# Altium PCB ConnectorPMOD.PcbDoc
Units mm, origin at the board's own origin, x right, y up, seen from the top; angles counter-clockwise.
Board outline 50 x 50 mm, 2 copper layers (Top Layer, Bottom Layer); 17 components, 10 nets, 60 pads, 11 vias.
Unrouted connection lines stored in the file: 2.
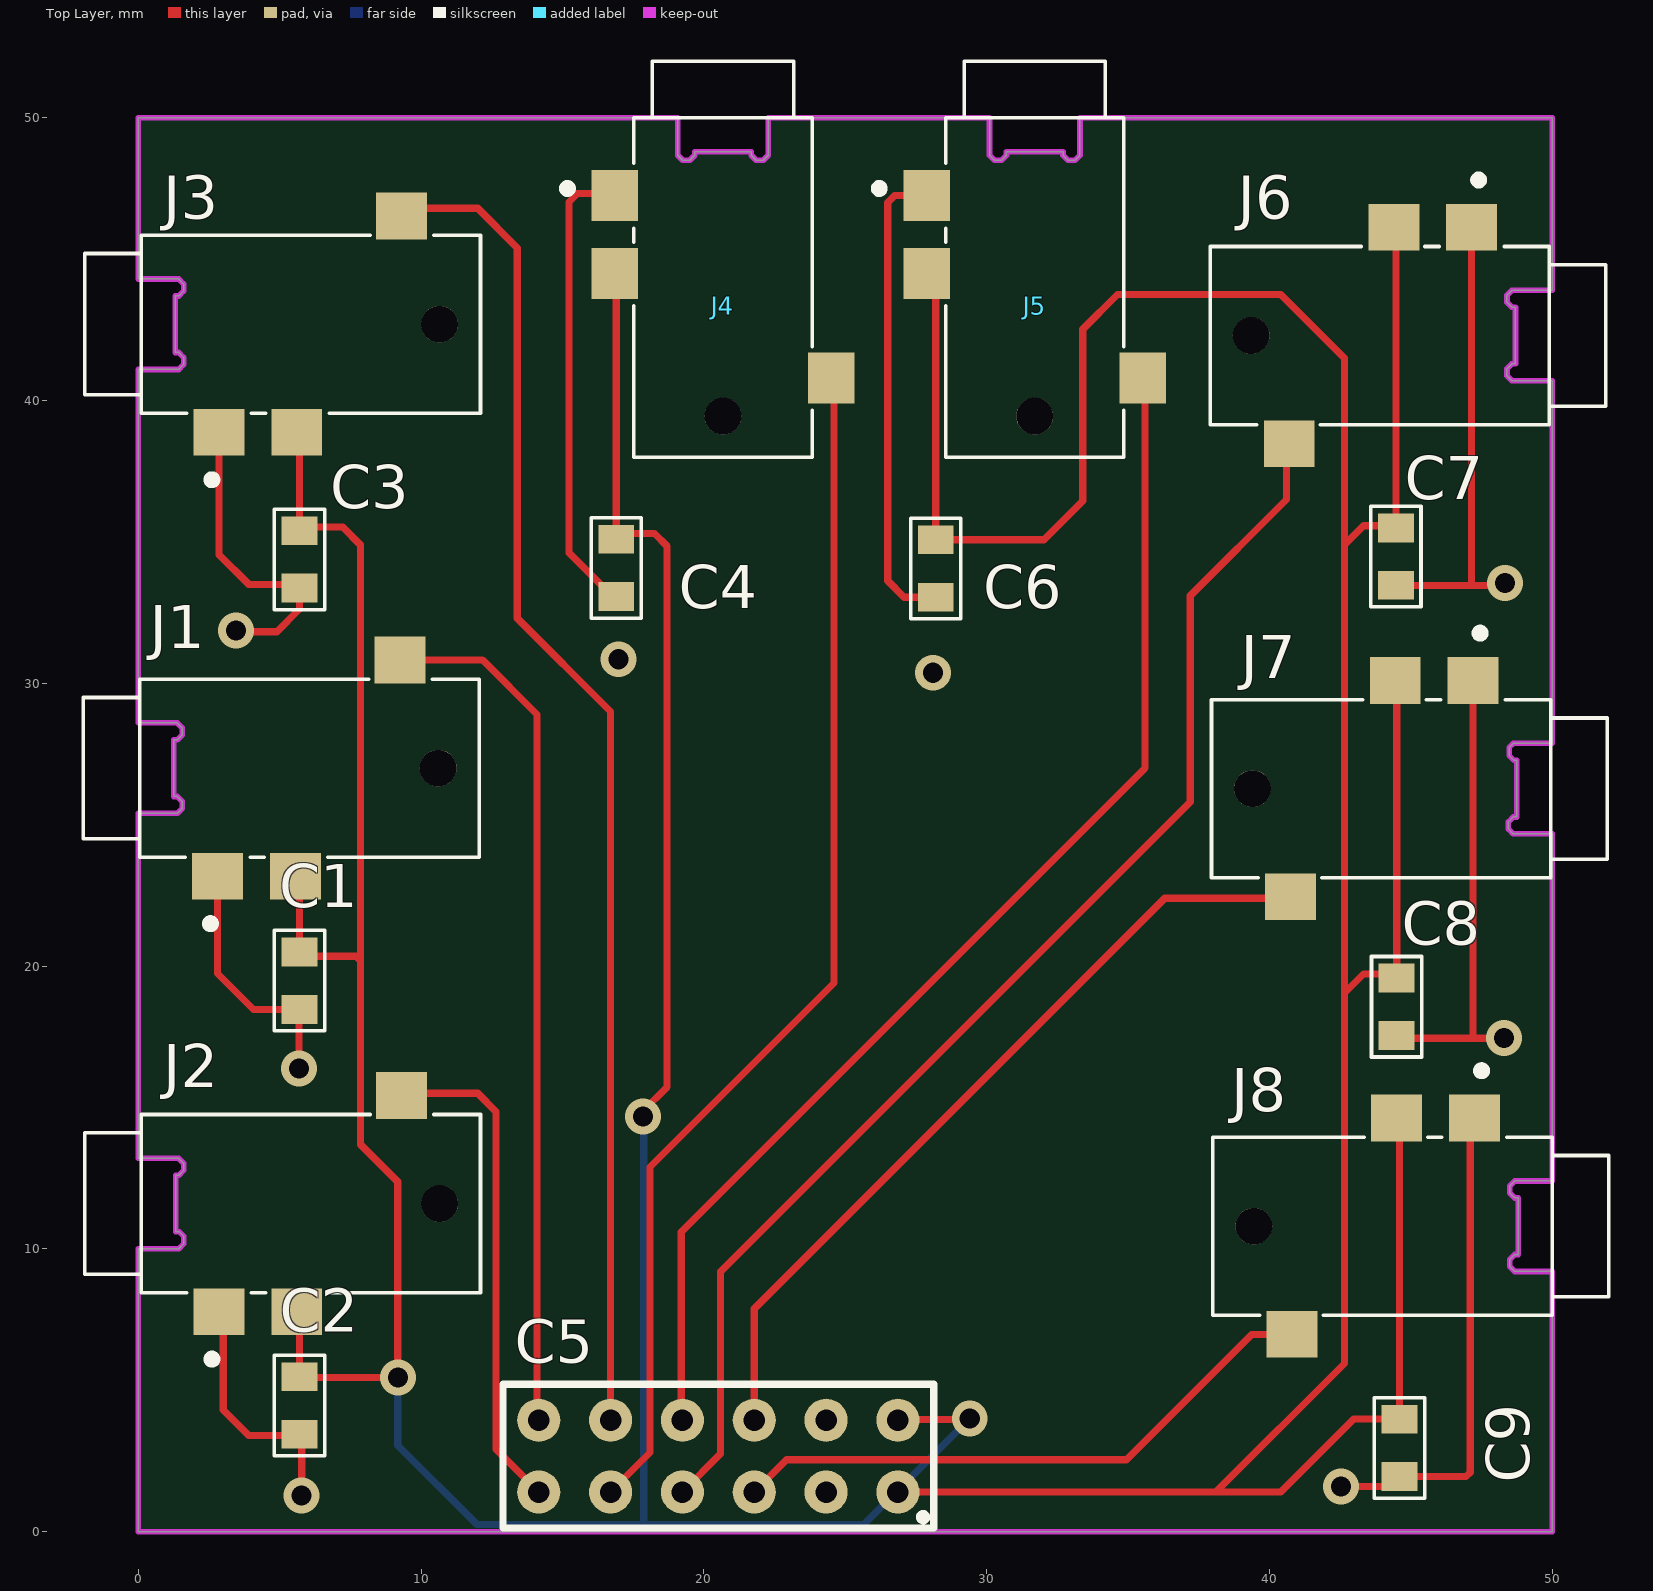
[diagram p0: Top Layer view]
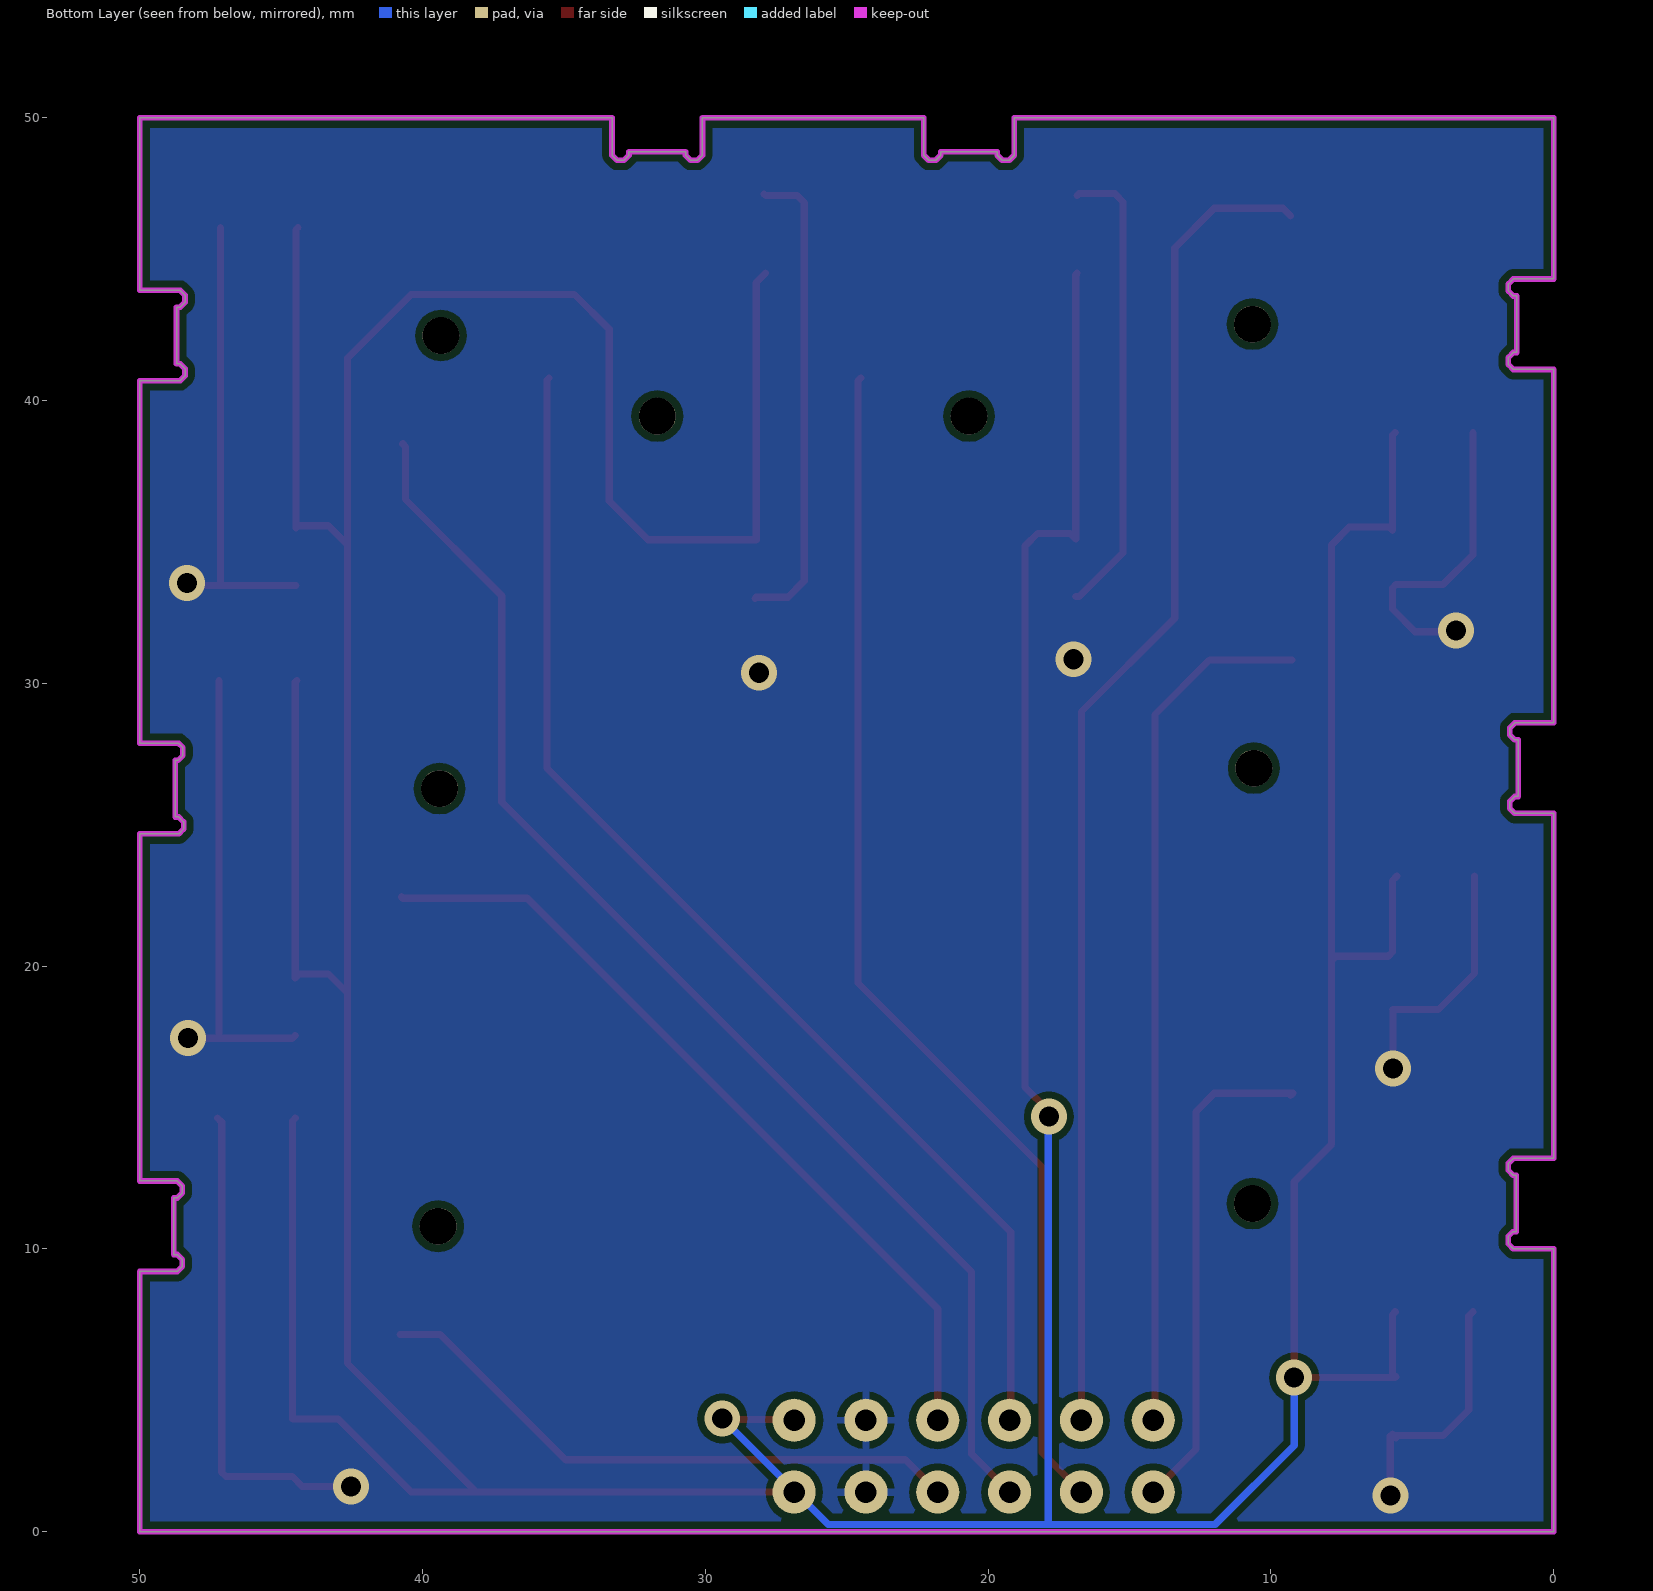
[diagram p1: Bottom Layer view, seen from below]

## Layer stack, top to bottom
Top Solder: solder mask 0.0102, Solder Resist, Dk 3.5
Top Layer: signal copper 0.0356
Dielectric 1: dielectric 0.32, FR-4, Dk 4.8
Bottom Layer: signal copper 0.0356
Bottom Solder: solder mask 0.0102, Solder Resist, Dk 3.5

## Board outline
1.425,10 1.6,10.175 1.6,10.45 1.45,10.6 1.325,10.6 1.325,12.6 1.425,12.6 1.6,12.775 1.6,13.025 1.425,13.2 0,13.2 0,25.4 1.375,25.4 1.55,25.575 1.55,25.825 1.375,26 1.25,26 1.25,28 1.375,28 1.55,28.175 1.55,28.425 1.375,28.6 0,28.6 0,41.1 1.425,41.1 1.6,41.275 1.6,41.525 1.425,41.7 1.3,41.7 1.3,43.7 1.425,43.7 1.6,43.875 1.6,44.125 1.425,44.3 0,44.3 0,50 19.075,50 19.075,48.675 19.25,48.5 19.5,48.5 19.675,48.675 19.675,48.8 21.675,48.8 21.675,48.675 21.85,48.5 22.1,48.5 22.275,48.675 22.275,50 30.1,50 30.1,48.675 30.275,48.5 30.525,48.5 30.7,48.675 30.7,48.8 32.7,48.8 32.7,48.675 32.875,48.5 33.125,48.5 33.3,48.675 33.3,50 50,50 50,43.9 48.575,43.9 48.4,43.725 48.4,43.475 48.575,43.3 48.7,43.3 48.7,41.3 48.575,41.3 48.4,41.125 48.4,40.875 48.575,40.7 50,40.7 50,27.875 48.625,27.875 48.475,27.725 48.475,27.45 48.65,27.275 48.75,27.275 48.75,25.275 48.625,25.275 48.45,25.1 48.45,24.85 48.625,24.675 50,24.675 50,12.4 48.675,12.4 48.5,12.225 48.5,11.975 48.675,11.8 48.8,11.8 48.8,9.8 48.675,9.8 48.5,9.625 48.5,9.375 48.675,9.2 50,9.2 50,0 0,0 0,10

## Design rules (kind name [scope] priority, off if disabled: settings)
Clearance [All] p1: gap=0.254 ignorepadtopadclearanceinfootprint=FALSE except(0: Arc-Hole Track-Hole SMDPad-Hole THPad-Hole Via-Hole Fill-Hole Poly-Hole Region-Hole Text-Hole)
PolygonConnect [All] p1: connectstyle=Relief reliefconductorwidth=0.254 reliefentries=4 polygonreliefangle="90 Angle" airgapwidth=0.254
RoomDefinition ConnectorPMOD [InComponentClass('ConnectorPMOD')] p1: confinementstyle=ConfineIn formatcopy=TRUE lockcomponents=FALSE outline 51.1,1.5 223,1.5 223,26.7 51.1,26.7
RoutingVias [All] p1: holewidth=0.711 width=1.27 viastyle="Through Hole" minholewidth=0.711 minwidth=1.27 maxholewidth=0.711 maxwidth=1.27
SolderMaskExpansion [All] p1: expansion=0.102 istentingtop=FALSE
Width [All] p1: maxlimit=0.254 minlimit=0.254 preferedwidth=0.254
30 further rules are at their usual default settings.

## Components (designator, comment, footprint, x,y, rotation, side; value= is the part's Value field where it differs from the comment)
C1 "1u" 0805C-GENERIC 5.7,18.722 r90 top
C2 "1u" 0805C-GENERIC 5.7,3.7 r90 top
C3 "1u" 0805C-GENERIC 5.7,33.622 r90 top
C4 "1u" 0805C-GENERIC 16.9,33.322 r90 top
C5 "PMOD" PMOD 16.7,3.94 r270 top
C6 "1u" 0805C-GENERIC 28.2,33.3 r90 top
C7 "1u" 0805C-GENERIC 44.472,33.718 r90 top
C8 "1u" 0805C-GENERIC 44.5,17.8 r90 top
C9 "1u" 0805C-GENERIC 44.6,2.2 r90 top
J1 "SJ2-35953A-SMT-TR" CUI_SJ2-35953A-SMT-TR 6.05,27 r0 top
J2 "SJ2-35953A-SMT-TR" CUI_SJ2-35953A-SMT-TR 6.1,11.6 r0 top
J3 "SJ2-35953A-SMT-TR" CUI_SJ2-35953A-SMT-TR 6.1,42.7 r0 top
J4 "SJ2-35953A-SMT-TR" CUI_SJ2-35953A-SMT-TR 20.675,44 r270 top
J5 "SJ2-35953A-SMT-TR" CUI_SJ2-35953A-SMT-TR 31.7,44 r270 top
J6 "SJ2-35953A-SMT-TR" CUI_SJ2-35953A-SMT-TR 43.9,42.3 r180 top
J7 "SJ2-35953A-SMT-TR" CUI_SJ2-35953A-SMT-TR 43.95,26.275 r180 top
J8 "SJ2-35953A-SMT-TR" CUI_SJ2-35953A-SMT-TR 44,10.8 r180 top

## Footprints (in the part's own frame and the unit in brackets; to place one, negate y for a bottom-side part, rotate by r counter-clockwise, add the part's x,y. Pads: shape width x height; smd on the part's side, far side on the other; paste and mask are expansions set on the pad)
0805C-GENERIC [mil] "CAPACITOR 0805"
  rect 40x50 smd: 1(-10,0) 2(70,0)
  silkscreen extent -40,-35 100,35, body extent -11,-25 70,25, height 26
CUI_SJ2-35953A-SMT-TR [mm]
  rect 1.8x1.65 smd: 1(-3.25,-3.825) 2(3.2,3.825) 3(-0.5,-3.825)
  round 1.3 hole 1.3 unplated: ""(4.55,0)
  silkscreen extent -8,-5.65 6,3.15
PMOD [mil]
  round 60 hole 30: 1(0,-100) 2(0,0) 3(0,100) 4(0,200) 5(0,300) 6(0,400) 7(100,-100) 8(100,0) 9(100,100) 10(100,200) 11(100,300) 12(100,400)
  silkscreen extent -50,-150 150,450

## Part data
C1 C2 C3 C4 C6 C7 C8 C9: library part C0805-GENERIC, "GENERIC CAPACITOR NON POLARISED0603"
J1 J2 J3 J4 J5 J6 J7 J8: "3.5 mm, Stereo, Right Angle, Surface Mount _SMT_, Audio Jack Connector", Package=None, Availability=Unavailable, CUI_purchase_URL=https://www.cuidevices.com/product/interconnect/connectors/audio-connectors/jacks/sj2-3595x-smt-series?utm_source=snapeda.com&utm_medium=referral&utm_campaign=snapedaBOM, MF="CUI Devices", MP=SJ2-35953A-SMT-TR, Price=None, SnapEDA_Link=https://www.snapeda.com/parts/SJ2-35953A-SMT-TR/CUI%20Devices/view-part/701771/?ref=snap

## Via types
v1: diameter 1.27, hole 0.711, Top Layer to Bottom Layer, 11 vias

## Nets (pads, with @x,y where several pads share a name; then routed paths per layer and width w, separated by ;. In a path a pad name is that pad's centre, name@x,y a point inside that pad or via, vN(x,y) a via of type N, cw(c..) or ccw(c..) an arc to the next point about the centre after c; other vN are vias at no path point)
GND: C1.1 C2.1 C3.1 C4.1 C5.5 C5.11 C6.1 C7.1 C8.1 C9.1 J1.1 J2.1 J3.1 J4.1 J5.1 J6.1 J7.1 J8.1 | length 113.4
  Top Layer w0.254: J1.1 2.8,19.736 4.068,18.468 C1.1 5.675,18.443 v1(5.675,16.375) ; J2.1 3,7.625 3,4.3 3.9,3.4 5.654,3.4 C2.1@5.575,3.321 ; J3.1 2.85,34.55 3.9,33.5 5.568,33.5 C3.1 5.7,32.625 4.9,31.825 3.5,31.825 v1(3.45,31.875) ; C2.1 5.775,3.371 v1(5.775,1.275) ; J4.1 16.78,47.32 15.52,47.32 15.225,47.025 15.225,34.616 16.773,33.068 C4.1 ; C5.11@24.101,1.181 C5.11 C5.11@24.539,1.181 ; J5.1@27.925,47.3 J5.1 26.75,47.25 26.5,47 26.5,33.625 27.079,33.046 C6.1 C6.1@28.246,33 ; v1@42.47,1.729 42.599,1.6 44.254,1.6 C9.1 46.951,1.946 47.1,2.095 47.1,14.475 J8.1 ; C7.1 47.125,33.464 ; C8.1 44.596,17.45 47.175,17.45 ; J6.1 47.15,33.489 47.125,33.464 ; J7.1 47.2,17.475 47.175,17.45 ; v1(48.3,17.45) 47.175,17.45 ; v1(48.325,33.55) 48.239,33.464 47.125,33.464
  other v1: 42.525,1.6 28.1,30.375 16.975,30.85
NetC5_1: C5.1 J1.2 | length 30.6
  Top Layer w0.254: J1.2 12.175,30.825 14.1,28.9 14.1,4 C5.1
NetC5_2: C5.2 J3.2 | length 47.6
  Top Layer w0.254: J3.2 9.575,46.8 12,46.8 13.4,45.4 13.4,32.3 16.7,29 C5.2
NetC5_3: C5.3 J5.2 | length 43.7
  Top Layer w0.254: C5.3 19.2,3.98 19.2,10.6 35.6,27 35.6,40.725 J5.2
NetC5_4: C5.4 J7.2 | length 28.9
  Top Layer w0.254: C5.4 21.78,7.88 36.3,22.4 40.7,22.4 J7.2
NetC5_7: C5.7 J2.2 | length 17.9
  Top Layer w0.254: J2.2 9.225,15.5 12,15.5 12.65,14.85 12.65,2.91 C5.7
NetC5_8: C5.8 J4.2 | length 42.7
  Top Layer w0.254: C5.8 18.097,2.797 18.097,12.897 24.6,19.4 24.6,40.7 J4.2
NetC5_9: C5.9 J6.2 | length 46
  Top Layer w0.254: C5.9 20.591,2.752 20.591,9.191 37.2,25.8 37.2,33.1 40.6,36.5 40.6,38.375 J6.2
NetC5_10: C5.10 J8.2 | length 21.3
  Top Layer w0.254: C5.10 22.923,2.543 34.943,2.543 39.375,6.975 J8.2
VCC: C1.2 C2.2 C3.2 C4.2 C5.6 C5.12 C6.2 C7.2 C8.2 C9.2 J1.3 J2.3 J3.3 J4.3 J5.3 J6.3 J7.3 J8.3 | length 250.8
  Top Layer w0.254: J1.3 5.7,23.025 C1.2 5.85,20.35 7.701,20.35 7.85,20.201 ; J2.3 5.7,7.675 C2.2 5.573,5.478 5.601,5.45 v1(9.175,5.45) 9.175,12.375 7.85,13.7 7.85,20.201 ; J3.3 5.7,38.775 C3.2 5.825,35.525 7.225,35.525 7.85,34.9 7.85,20.201 ; J4.3 16.9,44.45 C4.2 17.1,35.3 18.25,35.3 18.7,34.85 18.7,15.725 17.85,14.875 v1(17.85,14.675) ; C5.12@26.641,1.181 C5.12 38.1,1.4 ; C5.6 26.89,3.97 29.37,3.97 v1(29.4,4) ; J5.3 28.2,44.175 C6.2 32.028,35.078 33.399,36.449 33.399,42.526 34.624,43.75 40.4,43.75 42.65,41.5 42.65,34.9 ; J6.3 44.472,46.053 C7.2 44.394,35.575 43.325,35.575 42.65,34.9 ; J7.3 44.5,30.05 C8.2 44.353,19.725 43.325,19.725 42.65,19.05 ; J8.3 44.6,14.525 C9.2 42.978,3.978 40.4,1.4 38.1,1.4 ; 38.1,1.4 42.65,5.95 42.65,19.05 ; 42.65,19.05 42.65,34.9
  Bottom Layer w0.254: v1(9.175,5.45) 9.175,3.05 11.968,0.257 17.9,0.257 ; v1(17.85,14.675) 17.875,14.65 17.875,0.282 17.9,0.257 ; v1(29.4,4) 25.657,0.257 17.9,0.257
pads on no net: J1. J2. J3. J4. J5. J6. J7. J8.

## Polygon pours and split planes (outlines as drawn)
GND on Bottom Layer "GND_L01_P004" (solid, remove dead copper, pour order 4): 0,0 0,50 50,50 50,0

## Keep-outs
Keep-Out Layer:
  lines w0.2: 0,0 0,10 ; 0,0 50,0 ; 0,0 0,10 ; 0,0 50,0 ; 0,10 1.425,10 ; 0,10 1.425,10 ; 0,13.2 0,25.4 ; 0,13.2 1.425,13.2 ; 0,13.2 0,25.4 ; 0,13.2 1.425,13.2 ; 0,25.4 1.375,25.4 ; 0,25.4 1.375,25.4 ; 0,28.6 0,41.1 ; 0,28.6 1.375,28.6 ; 0,28.6 0,41.1 ; 0,28.6 1.375,28.6 ; 0,41.1 1.425,41.1 ; 0,41.1 1.425,41.1 ; 0,44.3 0,50 ; 0,44.3 1.425,44.3 ; 0,44.3 0,50 ; 0,44.3 1.425,44.3 ; 0,50 19.075,50 ; 0,50 19.075,50 ; 1.25,26 1.25,28 ; 1.25,26 1.375,26 ; 1.25,26 1.25,28 ; 1.25,26 1.375,26 ; 1.25,28 1.375,28 ; 1.25,28 1.375,28 ; 1.3,41.7 1.3,43.7 ; 1.3,41.7 1.425,41.7 ; 1.3,41.7 1.3,43.7 ; 1.3,41.7 1.425,41.7 ; 1.3,43.7 1.425,43.7 ; 1.3,43.7 1.425,43.7 ; 1.325,10.6 1.325,12.6 ; 1.325,10.6 1.45,10.6 ; 1.325,10.6 1.325,12.6 ; 1.325,10.6 1.45,10.6 ; 1.325,12.6 1.425,12.6 ; 1.325,12.6 1.425,12.6 ; 1.375,25.4 1.55,25.575 ; 1.375,25.4 1.55,25.575 ; 1.375,26 1.55,25.825 ; 1.375,26 1.55,25.825 ; 1.375,28 1.55,28.175 ; 1.375,28 1.55,28.175 ; 1.375,28.6 1.55,28.425 ; 1.375,28.6 1.55,28.425 ; 1.425,10 1.6,10.175 ; 1.425,10 1.6,10.175 ; 1.425,12.6 1.6,12.775 ; 1.425,12.6 1.6,12.775 ; 1.425,13.2 1.6,13.025 ; 1.425,13.2 1.6,13.025 ; 1.425,41.1 1.6,41.275 ; 1.425,41.1 1.6,41.275 ; 1.425,41.7 1.6,41.525 ; 1.425,41.7 1.6,41.525 ; 1.425,43.7 1.6,43.875 ; 1.425,43.7 1.6,43.875 ; 1.425,44.3 1.6,44.125 ; 1.425,44.3 1.6,44.125 ; 1.45,10.6 1.6,10.45 ; 1.45,10.6 1.6,10.45 ; 1.55,25.575 1.55,25.825 ; 1.55,25.575 1.55,25.825 ; 1.55,28.175 1.55,28.425 ; 1.55,28.175 1.55,28.425 ; 1.6,10.175 1.6,10.45 ; 1.6,10.175 1.6,10.45 ; 1.6,12.775 1.6,13.025 ; 1.6,12.775 1.6,13.025 ; 1.6,41.275 1.6,41.525 ; 1.6,41.275 1.6,41.525 ; 1.6,43.875 1.6,44.125 ; 1.6,43.875 1.6,44.125 ; 19.075,48.675 19.25,48.5 ; 19.075,48.675 19.075,50 ; 19.075,48.675 19.25,48.5 ; 19.075,48.675 19.075,50 ; 19.25,48.5 19.5,48.5 ; 19.25,48.5 19.5,48.5 ; 19.5,48.5 19.675,48.675 ; 19.5,48.5 19.675,48.675 ; 19.675,48.675 19.675,48.8 ; 19.675,48.675 19.675,48.8 ; 19.675,48.8 21.675,48.8 ; 19.675,48.8 21.675,48.8 ; 21.675,48.675 21.85,48.5 ; 21.675,48.675 21.675,48.8 ; 21.675,48.675 21.85,48.5 ; 21.675,48.675 21.675,48.8 ; 21.85,48.5 22.1,48.5 ; 21.85,48.5 22.1,48.5 ; 22.1,48.5 22.275,48.675 ; 22.1,48.5 22.275,48.675 ; 22.275,48.675 22.275,50 ; 22.275,48.675 22.275,50 ; 22.275,50 30.1,50 ; 22.275,50 30.1,50 ; 30.1,48.675 30.275,48.5 ; 30.1,48.675 30.1,50 ; 30.1,48.675 30.275,48.5 ; 30.1,48.675 30.1,50 ; 30.275,48.5 30.525,48.5 ; 30.275,48.5 30.525,48.5 ; 30.525,48.5 30.7,48.675 ; 30.525,48.5 30.7,48.675 ; 30.7,48.675 30.7,48.8 ; 30.7,48.675 30.7,48.8 ; 30.7,48.8 32.7,48.8 ; 30.7,48.8 32.7,48.8 ; 32.7,48.675 32.875,48.5 ; 32.7,48.675 32.7,48.8 ; 32.7,48.675 32.875,48.5 ; 32.7,48.675 32.7,48.8 ; 32.875,48.5 33.125,48.5 ; 32.875,48.5 33.125,48.5 ; 33.125,48.5 33.3,48.675 ; 33.125,48.5 33.3,48.675 ; 33.3,48.675 33.3,50 ; 33.3,48.675 33.3,50 ; 33.3,50 50,50 ; 33.3,50 50,50 ; 48.4,40.875 48.575,40.7 ; 48.4,40.875 48.4,41.125 ; 48.4,40.875 48.575,40.7 ; 48.4,40.875 48.4,41.125 ; 48.4,41.125 48.575,41.3 ; 48.4,41.125 48.575,41.3 ; 48.4,43.475 48.575,43.3 ; 48.4,43.475 48.4,43.725 ; 48.4,43.475 48.575,43.3 ; 48.4,43.475 48.4,43.725 ; 48.4,43.725 48.575,43.9 ; 48.4,43.725 48.575,43.9 ; 48.45,24.85 48.625,24.675 ; 48.45,24.85 48.45,25.1 ; 48.45,24.85 48.625,24.675 ; 48.45,24.85 48.45,25.1 ; 48.45,25.1 48.625,25.275 ; 48.45,25.1 48.625,25.275 ; 48.475,27.45 48.65,27.275 ; 48.475,27.45 48.475,27.725 ; 48.475,27.45 48.65,27.275 ; 48.475,27.45 48.475,27.725 ; 48.475,27.725 48.625,27.875 ; 48.475,27.725 48.625,27.875 ; 48.5,9.375 48.675,9.2 ; 48.5,9.375 48.5,9.625 ; 48.5,9.375 48.675,9.2 ; 48.5,9.375 48.5,9.625 ; 48.5,9.625 48.675,9.8 ; 48.5,9.625 48.675,9.8 ; 48.5,11.975 48.675,11.8 ; 48.5,11.975 48.5,12.225 ; 48.5,11.975 48.675,11.8 ; 48.5,11.975 48.5,12.225 ; 48.5,12.225 48.675,12.4 ; 48.5,12.225 48.675,12.4 ; 48.575,40.7 50,40.7 ; 48.575,40.7 50,40.7 ; 48.575,41.3 48.7,41.3 ; 48.575,41.3 48.7,41.3 ; 48.575,43.3 48.7,43.3 ; 48.575,43.3 48.7,43.3 ; 48.575,43.9 50,43.9 ; 48.575,43.9 50,43.9 ; 48.625,24.675 50,24.675 ; 48.625,24.675 50,24.675 ; 48.625,25.275 48.75,25.275 ; 48.625,25.275 48.75,25.275 ; 48.625,27.875 50,27.875 ; 48.625,27.875 50,27.875 ; 48.65,27.275 48.75,27.275 ; 48.65,27.275 48.75,27.275 ; 48.675,9.2 50,9.2 ; 48.675,9.2 50,9.2 ; 48.675,9.8 48.8,9.8 ; 48.675,9.8 48.8,9.8 ; 48.675,11.8 48.8,11.8 ; 48.675,11.8 48.8,11.8 ; 48.675,12.4 50,12.4 ; 48.675,12.4 50,12.4 ; 48.7,41.3 48.7,43.3 ; 48.7,41.3 48.7,43.3 ; 48.75,25.275 48.75,27.275 ; 48.75,25.275 48.75,27.275 ; 48.8,9.8 48.8,11.8 ; 48.8,9.8 48.8,11.8 ; 50,0 50,9.2 ; 50,0 50,9.2 ; 50,12.4 50,24.675 ; 50,12.4 50,24.675 ; 50,27.875 50,40.7 ; 50,27.875 50,40.7 ; 50,43.9 50,50 ; 50,43.9 50,50

## Text inside footprints (layer, text, board x,y; h text height)
J1: Mechanical 13 "PCB Edge" at -9.681,34.014 h1.27
J2: Mechanical 13 "PCB Edge" at -9.63,18.614 h1.27
J3: Mechanical 13 "PCB Edge" at -9.63,49.714 h1.27
J4: Mechanical 13 "PCB Edge" at 27.689,59.731 h1.27 r270
J5: Mechanical 13 "PCB Edge" at 38.714,59.731 h1.27 r270
J6: Mechanical 13 "PCB Edge" at 59.631,35.286 h1.27 r180
J7: Mechanical 13 "PCB Edge" at 59.68,19.261 h1.27 r180
J8: Mechanical 13 "PCB Edge" at 59.731,3.786 h1.27 r180